# Altium PCB Accumulator_DC-DC.PcbDoc
Units mm, origin at the board's own origin, x right, y up, seen from the top; angles counter-clockwise.
Board outline 108.46 x 67.79 mm, 2 copper layers (Top Layer, Bottom Layer); 23 components, 9 nets, 54 pads, 31 vias.
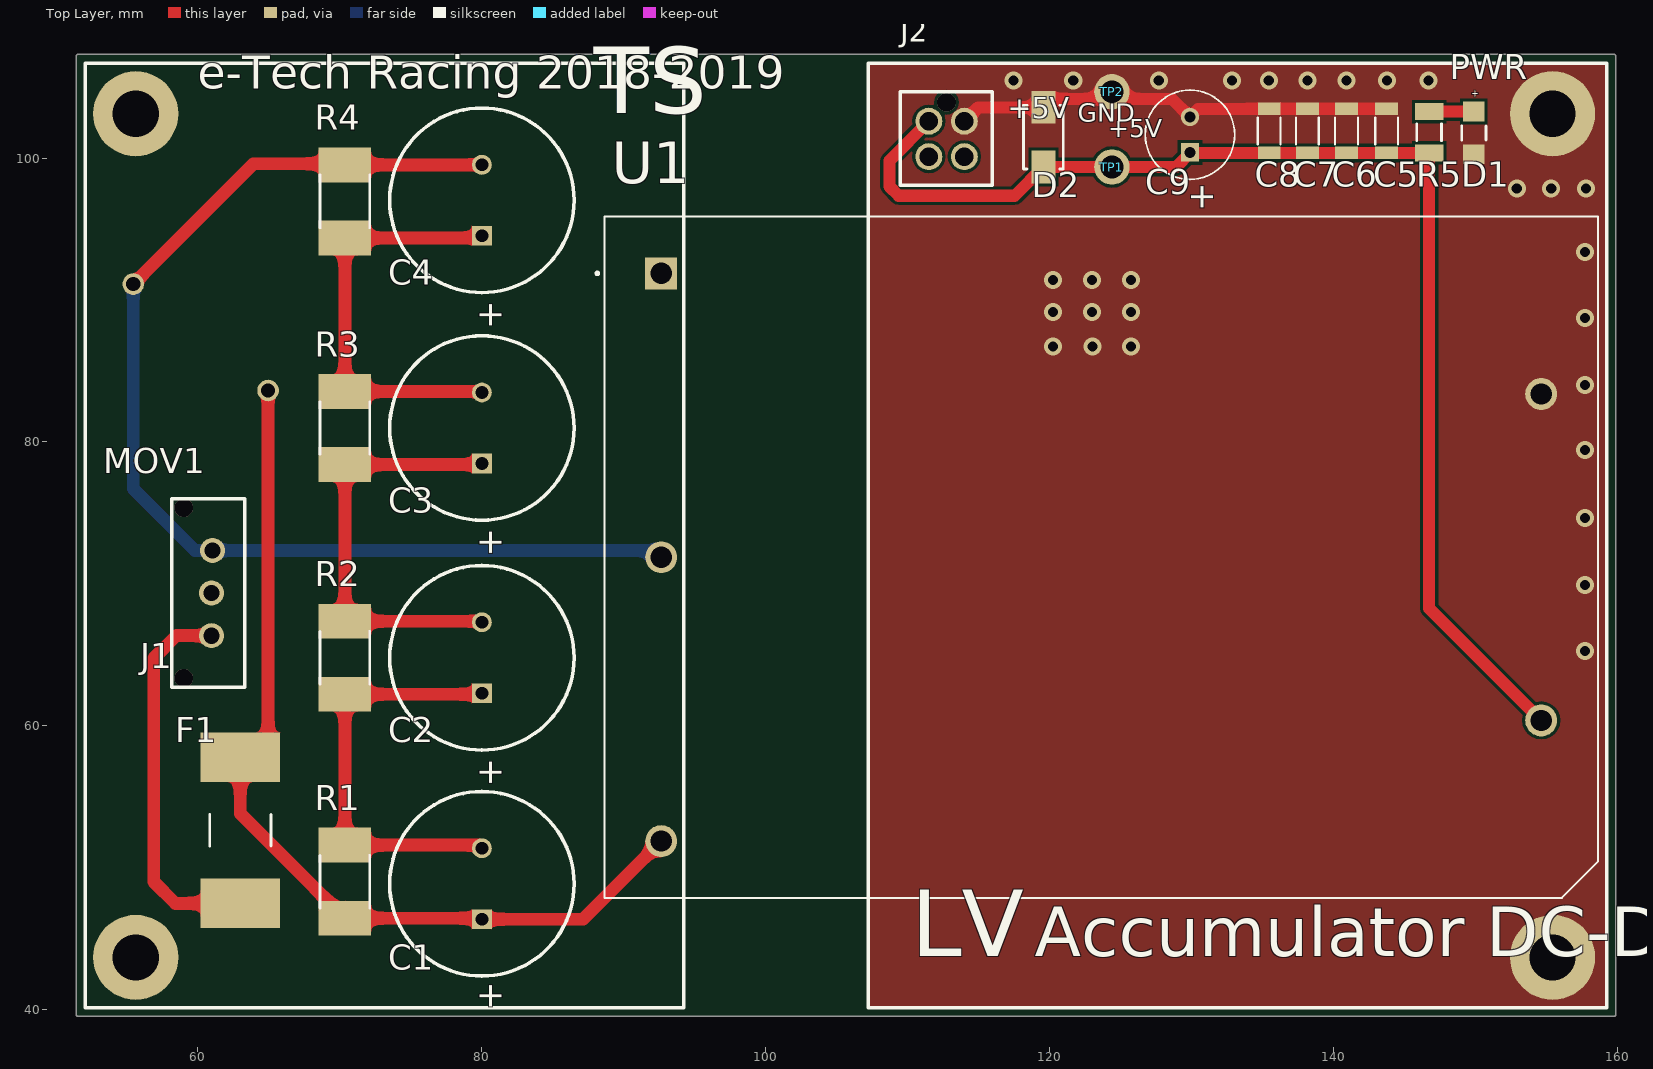
[diagram p0: Top Layer view]
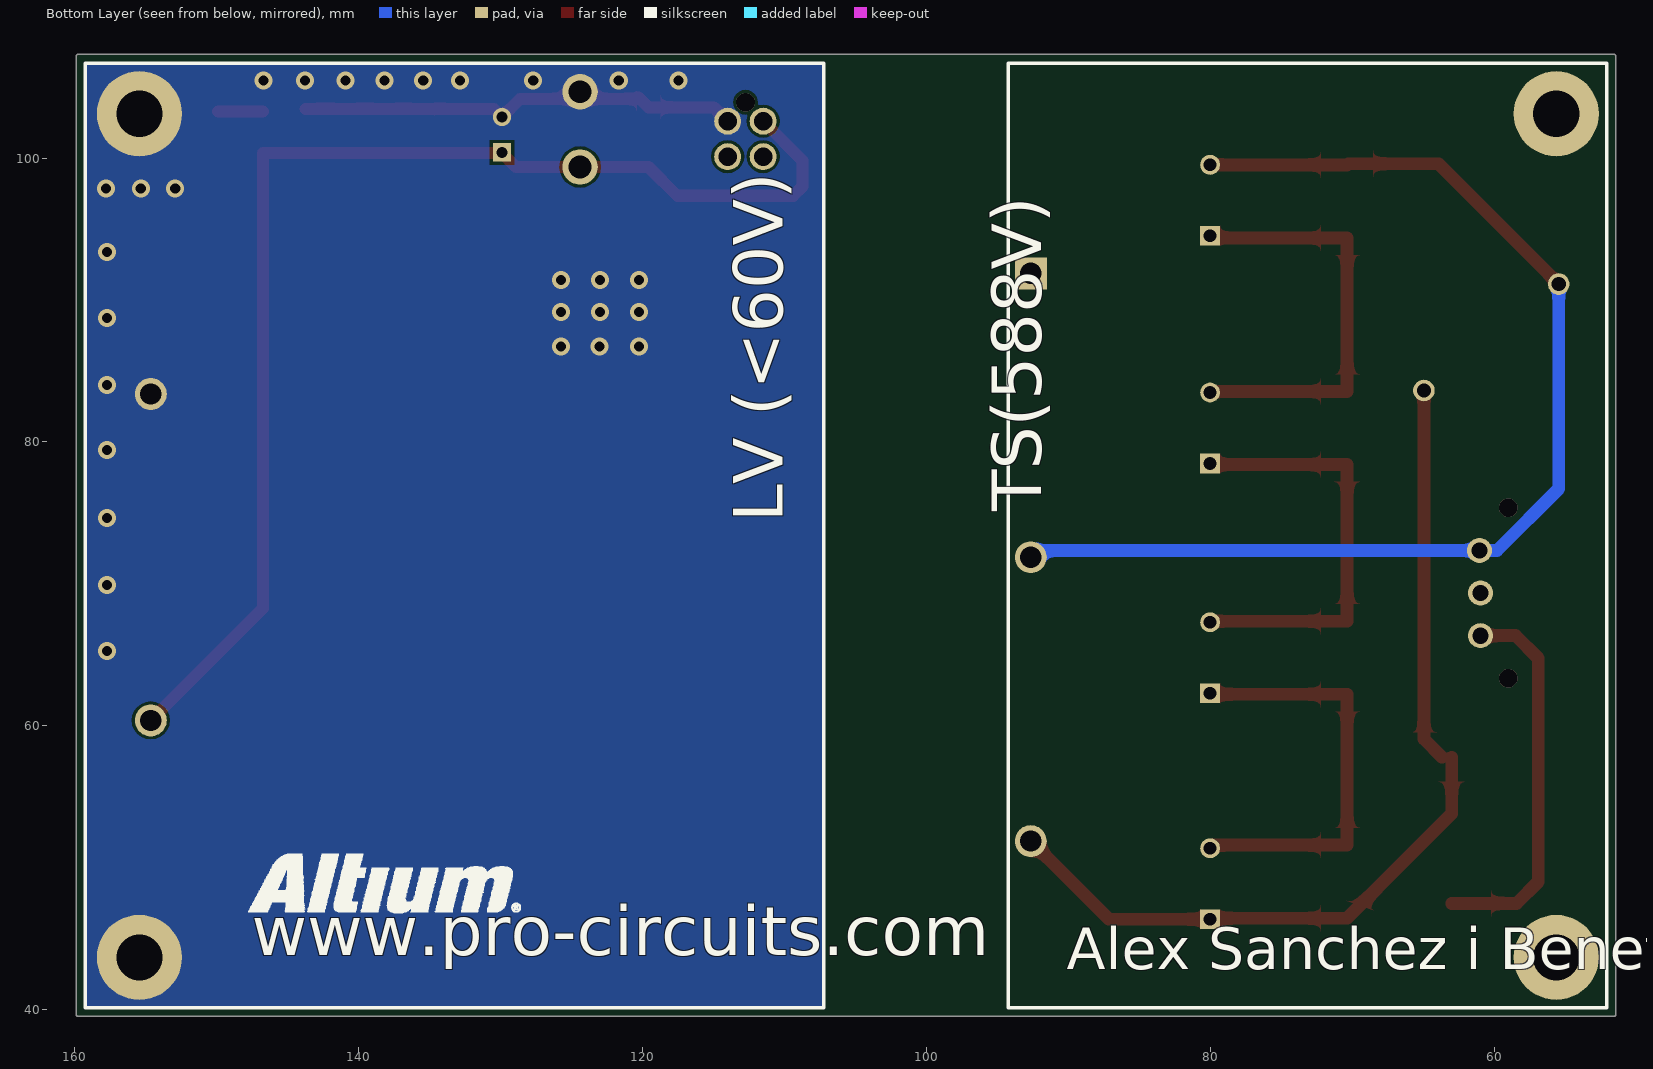
[diagram p1: Bottom Layer view, seen from below]
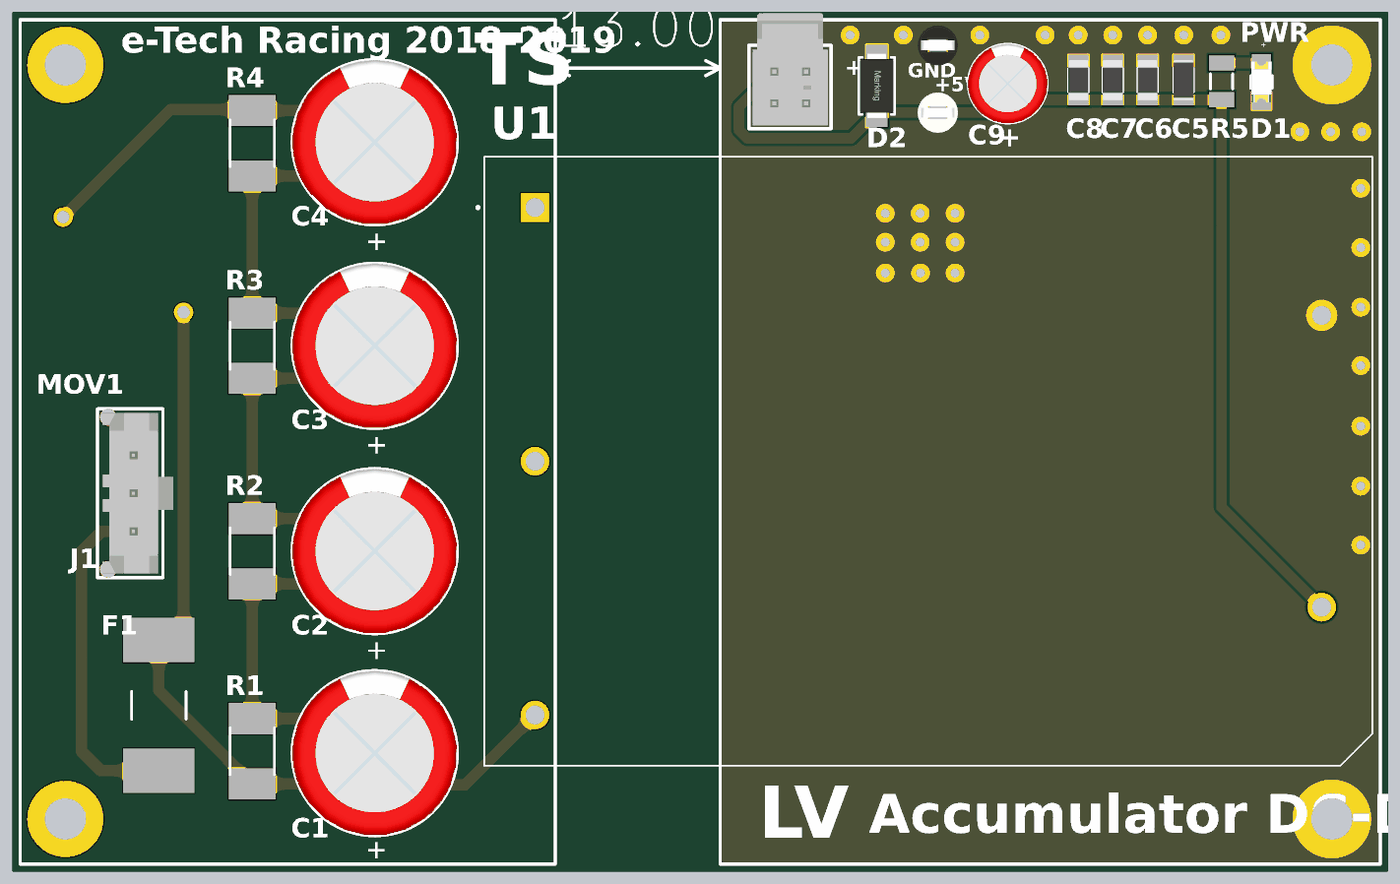
[diagram p2: 3D render of the assembled board from above, using the file's embedded part models]

## Layer stack, top to bottom
Top Solder: solder mask 0.0102, Solder Resist, Dk 3.5
Top Layer: signal copper 0.0356
Dielectric 1: dielectric 0.32, FR-4, Dk 4.8
Bottom Layer: signal copper 0.0356
Bottom Solder: solder mask 0.0102, Solder Resist, Dk 3.5

## Board outline
51.435,39.654 ccw(c51.562,39.654) 51.562,39.526 159.736,39.526 ccw(c159.736,39.654) 159.751,39.527 ccw(c159.766,39.654) 159.893,39.654 159.893,107.188 ccw(c159.766,107.188) 159.766,107.315 51.562,107.315 ccw(c51.562,107.188) 51.435,107.188

## Design rules (kind name [scope] priority, off if disabled: settings)
Clearance [All] p1: gap=0.2 ignorepadtopadclearanceinfootprint=FALSE except(0: Arc-Hole Track-Hole SMDPad-Hole THPad-Hole Via-Hole Fill-Hole Poly-Hole Region-Hole Text-Hole)
PlaneConnect [All] p1: planeconnectstyle=Direct reliefexpansion=0.508 reliefentries=4 reliefconductorwidth=0.254 reliefairgap=0.254
PolygonConnect [All] p1: connectstyle=Direct reliefconductorwidth=0.254 reliefentries=4 polygonreliefangle="90 Angle" airgapwidth=0.254
RoomDefinition Accumulator_DC-DC [InComponentClass('Accumulator_DC-DC')] p1: confinementstyle=ConfineIn formatcopy=TRUE lockcomponents=FALSE outline 50.038,37.846 161.29,37.846 161.29,109.625 50.038,109.625
RoutingVias [All] p1: holewidth=0.711 width=1.27 viastyle="Through Hole" minholewidth=0.711 minwidth=1.27 maxholewidth=0.711 maxwidth=1.27
SolderMaskExpansion [All] p1: expansion=0.102
Width Width_TS [(InNet('TS+') OR InNet('TS-'))] p1: maxlimit=1 minlimit=0.8 preferedwidth=0.9 minimp=50.000000 maximp=50.000000 favimp=50.000000
Width Width_LV_Supply [(InNet('+5') OR InNet('GND_LV'))] p2: maxlimit=0.9 minlimit=0.75 preferedwidth=0.85 minimp=50.000000 maximp=50.000000 favimp=50.000000
Width [All] p3: maxlimit=0.9 minlimit=0.254 preferedwidth=0.254 minimp=50.000000 maximp=50.000000 favimp=50.000000
29 further rules are at their usual default settings.

## Components (designator, comment, footprint, x,y, rotation, side; value= is the part's Value field where it differs from the comment)
C1 "200Vdc, 47uF" WCAP-AT1H_13x20x5 80.01,48.874 r270 top value=47uF
C2 "200Vdc, 47uF" WCAP-AT1H_13x20x5 80.01,64.796 r270 top value=47uF
C3 "200Vdc, 47uF" WCAP-AT1H_13x20x5 80.01,80.986 r270 top locked value=47uF
C4 "200Vdc, 47uF" WCAP-AT1H_13x20x5 80.01,97.028 r270 top value=47uF
C5 "1uF" 1206_3.2x1.6x1.15mm 143.75,101.925 r270 top
C6 "100nF" 1206_3.2x1.6x0.8mm 140.925,101.925 r270 top
C7 "1nF" 1206_3.2x1.6x0.8mm 138.175,101.925 r270 top
C8 "100pF" 1206_3.2x1.6x0.8mm 135.475,101.925 r270 top
C9 "220uF" WCAP-ATG8_6.3x11x2.5 129.9,101.65 r270 top value="220 uF"
D1 "Green, 3.2 V, 140 deg" WL-SMCW_1206 149.9,101.775 r90 top
D2 "400W, 5VDC" WE-TVSP_DO-214AC_Bidirectional 119.575,101.475 r270 top
F1 "600 Vdc, 1A" 485001 62.992,52.644 r90 top
J1 "43650-0327" 43650-0327 60.96,69.36 r270 top
J2 "105310-1104" 105310-1104 112.75,102.6 r0 top
MOV1 "V1000LA80CP" V1000LA160CP 60.198,87.376 r270 top
R1 "2W, 1MΩ" CR2512 70.358,49.022 r270 top
R2 "2W, 1MΩ" CR2512 70.358,64.796 r270 top
R3 "2W, 1MΩ" CR2512 70.358,80.986 r270 top
R4 "2W, 1MΩ" CR2512 70.358,96.95 r270 top
R5 "0.25W, 100Ω" CR1206 146.75,101.825 r270 top
TP1 "5007" 5007 124.4,99.375 r0 top
TP2 "5006" 5006 124.4,104.675 r0 top
U1 "AE5-EW-S5" AE5-EW-S5 92.643,91.882 r0 top

## Footprints (in the part's own frame and the unit in brackets; to place one, negate y for a bottom-side part, rotate by r counter-clockwise, add the part's x,y. Pads: shape width x height; smd on the part's side, far side on the other; paste and mask are expansions set on the pad)
1206_3.2x1.6x0.8mm [mm] "Ceramic Capacitors, 1206, body 3.2x1.6mm"
  rect 0.9x1.6 smd: 1(-1.55,0) 2(1.55,0)
  silkscreen extent -0.95,-0.8 0.95,0.8, body extent -1.6,-0.8 1.6,0.8, height 0.83
1206_3.2x1.6x1.15mm [mm] "Ceramic Capacitors, 1206, body 3.2x1.6mm"
  rect 0.9x1.6 smd: 1(-1.55,0) 2(1.55,0)
  silkscreen extent -0.95,-0.8 0.95,0.8, body extent -1.6,-0.8 1.6,0.8, height 1.18
5006 [mm] "Compact THM Test Point, bLACK"
  round 2.5 hole 1.6: 0(0,0)
  body extent -1.6,-1.6 1.57,1.58, height 5.67
5007 [mm] "Compact THM Test Point, White"
  round 2.5 hole 1.6: 0(0,0)
  body extent -1.6,-1.6 1.58,1.58, height 5.67
43650-0327 [mm] "Micro-Fit 3.0 Vertical Header, 3.00mm Pitch, Single Row, 3 Circuits"
  round 1.75 hole 1.15: 1(3,0) 2(0,0) 3(-3,0.075)
  silkscreen extent -6.65,-2.8 6.65,2.35, body extent -6.32,-2.43 6.33,3.18, height 9.95
105310-1104 [mm] "Molex, Nano-Fit, Right Angle, Dual Row, 4 Circuits, Pitch 2.5 mm, Black"
  round 1.9 hole 1.3: 1(1.25,0) 2(-1.25,0) 3(1.25,-2.5) 4(-1.25,-2.5)
  silkscreen extent -3.25,-4.5 3.22,2.07, body extent -2.97,-4.24 2.97,4.6, height 10.53
485001 [mm] "Littlefuse, Fuse SMD Nano2"
  rect 3.5x5.6 smd: 1(-5.15,0) 2(5.15,0)
  silkscreen extent -1.1,-2.15 1.1,2.15, body extent -6.05,-2.25 6.05,2.25, height 4.5
AE5-EW-S5 [mm]
  rect 2.25x2.25 hole 1.5: 1(0,0)
  round 2.25 hole 1.5: 2(0,-20) 3(0,-40) 4(62,-31.5) 5(62,-8.5)
  silkscreen extent -4.6,-44 66,4, body extent -4.32,-44.26 66.22,4.32, height 23.5
CR1206 [mm] "Chip Resistor, 2-Leads, Body 3,20x1,60mm, IPC Medium Density"
  rect 1.2x2 smd: 1(-1.45,0) 2(1.45,0)
  silkscreen extent -0.6,-0.87 0.6,0.87, body extent -1.73,-0.87 1.73,0.88, height 0.75
CR2512 [mm] "Chip Resistor, 2-Leads, Body 6,40x3,20mm, IPC Medium Density"
  rect 2.45x3.7 smd: 1(-2.575,0) 2(2.575,0)
  silkscreen extent -1.85,-1.75 1.85,1.75, body extent -3.3,-1.7 3.3,1.7, height 0.75
V1000LA160CP [mil] "Littlefuse, C-III Varistor Series"
  round 60 hole 39.37: 1(-147.71,-187.01) 2(147.56,187)
  body extent -335,-276 335,276, height 886
WCAP-AT1H_13x20x5 [mm] "Aluminium Electrolytic Radial THD Capacitors, §¶13x20mm"
  rect 1.4x1.4 hole 0.9: 1(2.5,0)
  round 1.4 hole 0.9: 2(-2.5,0)
  silkscreen extent -6.5,-6.5 6.5,6.5, body extent -6.49,-6.5 6.5,6.5, height 20.26
WCAP-ATG8_6.3x11x2.5 [mm] "Aluminum Electrolytic Capacitors, 6.3x11mm"
  rect 1.3x1.3 hole 0.8: 1(1.25,0)
  round 1.3 hole 0.8: 2(-1.25,0)
  silkscreen extent -3.15,-3.15 3.15,3.15, body extent -3.14,-3.15 3.15,3.15, height 11.31
WE-TVSP_DO-214AC_Bidirectional [mm] "Power TVS Diode, 2-Leads. body 4.5x2.8mm"
  rect 2.3x1.7 smd: 1(-2.1,0) 2(2.1,0)
  silkscreen extent -2.25,-1.4 2.25,1.4, body extent -2.56,-1.33 2.56,1.34, height 2.24
WL-SMCW_1206 [mm] "SMD Mono-color Chip LED, body 3.2x1.6mm"
  rect 1.4x1.5 smd: 1(-1.5,0) 2(1.5,0)
  silkscreen extent -0.5,-0.85 0.5,0.85, body extent -1.6,-0.8 1.6,0.8, height 0.68

## Part data
C1 C2 C3 C4: library part 860241078002, "WCAP-AT1H Aluminum Electrolytic Capacitors, size ?13x20mm, 200V DC, 47uF", Operating Temperature="-25 °C up to +105 °C", Rated Voltage="200V DC", ComponentLink1Description=Manufacturer, ComponentLink1URL=http://www.we-online.de, ComponentLink2Description=Datasheet, ComponentLink2URL=http://katalog.we-online.de/pbs/datasheet/860241078002.pdf, Life Cycle=10000h, Part Number=860241078002, Published Date="June 2017", Publisher="Wurth Elektronik", Size=?13x20mm
C5: library part 885012208013, "WCAP-CSGP Ceramic Capacitors, 1206, X7R, 10V, 1uF", Manufacturer="Wurth Elektronik", Operating Temperature="-55 °C to +125 °C", Rated Voltage="10V DC", Ceramic Type=X7R, ComponentLink1Description=Manufacturer, ComponentLink1URL=http://www.we-online.de, ComponentLink2Description=Datasheet, ComponentLink2URL=http://katalog.we-online.de/pbs/datasheet/885012208013.pdf, Part Number=885012208013, Size=1206
C6: library part 885012208009, "WCAP-CSGP Ceramic Capacitors, 1206, X7R, 10V, 100nF", Manufacturer="Wurth Elektronik", Operating Temperature="-55 °C to +125 °C", Rated Voltage="10V DC", Ceramic Type=X7R, ComponentLink1Description=Manufacturer, ComponentLink1URL=http://www.we-online.de, ComponentLink2Description=Datasheet, ComponentLink2URL=http://katalog.we-online.de/pbs/datasheet/885012208009.pdf, Part Number=885012208009, Size=1206
C7: library part 885012208006, "WCAP-CSGP Ceramic Capacitors, 1206, X7R, 10V, 1nF", Manufacturer="Wurth Elektronik", Operating Temperature="-55 °C to +125 °C", Rated Voltage="10V DC", Ceramic Type=X7R, ComponentLink1Description=Manufacturer, ComponentLink1URL=http://www.we-online.de, ComponentLink2Description=Datasheet, ComponentLink2URL=http://katalog.we-online.de/pbs/datasheet/885012208006.pdf, Part Number=885012208006, Size=1206
C8: library part 885012008004, "WCAP-CSGP Ceramic Capacitors, 1206, NP0, 10V, 100pF", Manufacturer="Wurth Elektronik", Operating Temperature="-55 °C to +125 °C", Rated Voltage="10V DC", Ceramic Type=NP0, ComponentLink1Description=Manufacturer, ComponentLink1URL=http://www.we-online.de, ComponentLink2Description=Datasheet, ComponentLink2URL=http://katalog.we-online.de/pbs/datasheet/885012008004.pdf, Part Number=885012008004, Size=1206
C9: library part 860010273009, "WCAP-ATG8 Aluminum Electrolytic Capacitors, 6.3x11mm, 10 Vdc, 220 uF", Manufacturer="Wurth Elektronik", Operating Temperature="-40 °C up to +85 °C", Rated Voltage="10 Vdc", ComponentLink1Description=Manufacturer, ComponentLink1URL=http://www.we-online.de, ComponentLink2Description=Datasheet, ComponentLink2URL=http://katalog.we-online.de/pbs/datasheet/860010273009.pdf, Life Cycle=2000h, Part Number=860010273009, Size=6.3x11mm
D1: library part 150120GS75000, "SMT Mono-color Chip LED Waterclear WL-SMCW, size 1206, Green, 3.2 V, 140 deg, 450 mcd", Emitting Color=Green, Forward Voltage="3.2 V", Operating Temperature="-40 to 85 degC", Chip Technology=InGaN, ComponentLink1Description=Manufacturer, ComponentLink1URL=http://www.we-online.de, ComponentLink2Description=Datasheet, ComponentLink2URL=https://katalog.we-online.de/led/datasheet/150120GS75000.pdf, Dominant Wavelength="525 nm", Luminous Intensity="450 mcd", Mounting Technology=SMT, Packaging="Tape and Reel", Part Number=150120GS75000, Peak Wavelength="515 nm", Published Date="November 2018", Publisher="Wurth Elektronik", Size=1206, Viewing Angle="140 deg"
D2: library part 824501500, "WE-TVSP Power TVS Diode, size DO-214AC, Bidirectional, 400 W, 5 VDC", Manufacturer="Wurth Elektronik", Operating Temperature="-65ºC to 150 ºC", Peak Pulse Current="43.5 A", Power Dissipation="400 W", Reverse Breakdown Voltage="6.7 V", Reverse Stand-Off Voltage="5 V", Surge Clamping Voltage="9.2 V", ComponentLink1Description=Manufacturer, ComponentLink1URL=http://www.we-online.de, ComponentLink2Description=Datasheet, ComponentLink2URL=https://katalog.we-online.de/pbs/datasheet/824501500.pdf, Mounting Technology=SMT, Packaging="Tape and Reel", Part Number=824501500, Polarity=Bidirectional, Size=DO-214AC
F1: library part 485001, "485 Series Fuse", Manufacturer=Littlefuse, ComponentLink1Description=Datasheet, ComponentLink1URL=https://www.littelfuse.com/~/media/electronics/datasheets/fuses/littelfuse_fuse_485_datasheet.pdf.pdf
J1: "Micro-Fit 3.0 Vertical Header, 3.00mm Pitch, Single Row, 3 Circuits, Black", Manufacturer=Molex, Operating Temperature="-40° to +105°C", Rated Current=8.5A, Rated Voltage="600V DC", Circuits=3, ComponentLink1Description=Datasheet, ComponentLink1URL=https://www.molex.com/webdocs/datasheets/pdf/en-us/0436500327_PCB_HEADERS.pdf, Number of Row=1
J2: "Nano-Fit Vertical Header, Through Hole, 2.50mm Pitch, Dual Row, 4 Circuits, Black", Manufacturer=Molex, Operating Temperature="-40° to +105°C", Rated Current=6.5A, Rated Voltage="250V DC", ComponentLink2Description=Datasheet, ComponentLink2URL=https://www.molex.com/webdocs/datasheets/pdf/en-us/1053101104_PCB_HEADERS.pdf
MOV1: "C-III Varistor Series", Manufacturer=Littlefuse, ComponentLink1Description=Datasheet, ComponentLink1URL=https://www.littelfuse.com/~/media/electronics/datasheets/varistors/littelfuse_varistor_ciii_datasheet.pdf.pdf
R1 R2 R3 R4: library part CRS2512-FX-1004ELF, "High Power Anti-Surge Chip Resistor", Manufacturer=Bourns, ComponentLink1Description=Datasheet, ComponentLink1URL=https://www.bourns.com/docs/product-datasheets/crs.pdf?sfvrsn=2852b1ed_29
R5: library part CR1206-FX-1000ELF, "Chip Resistor", Manufacturer=Bourns, ComponentLink1Description=Datasheet, ComponentLink1URL=https://www.bourns.com/docs/product-datasheets/chpreztr.pdf?sfvrsn=566c91f1_11
TP1: "Compact THM Test Point, White", Manufacturer="Keystone Electronics", ComponentLink1Description="Datasheet (Mouser)", ComponentLink1URL=https://eu.mouser.com/datasheet/2/215/005-5009-741293.pdf
TP2: "Compact THM Test Point, Black", Color=Black, Manufacturer="Keystone Electronics", ComponentLink1Description="Datasheet (Mouser)", ComponentLink1URL=https://eu.mouser.com/datasheet/2/215/005-5009-741293.pdf
U1: "Ultra Wide Voltage Input DC-DC Converter", Manufacturer="CUI INC", ComponentLink1Description=Datasheet, ComponentLink1URL=https://www.cui.com/product/resource/ae5-ew.pdf, Datasheet=https://www.cui.com/product/resource/ae5-ew.pdf

## Free pads (board coordinates)
  round 6 hole 3.25: ""(55.626,43.688) ""(55.626,103.124) ""(155.448,43.688) ""(155.448,103.124)

## Via types
v1: diameter 1.27, hole 0.711, Top Layer to Bottom Layer, 28 vias
v2: diameter 1.3, hole 1.3, Top Layer to Bottom Layer, 2 vias
v3: diameter 1.32, hole 1.32, Top Layer to Bottom Layer, 1 vias

## Nets (pads, with @x,y where several pads share a name; then routed paths per layer and width w, separated by ;. In a path a pad name is that pad's centre, name@x,y a point inside that pad or via, vN(x,y) a via of type N, cw(c..) or ccw(c..) an arc to the next point about the centre after c; other vN are vias at no path point)
+5: C5.2 C6.2 C7.2 C8.2 C9.1 D2.2 J2.2 R5.2 TP1.0 U1.4 | length 88.6
  Top Layer w0.85: J2.2 108.725,99.825 108.725,98 109.375,97.35 117.55,97.35 D2.2 TP1.0 128.925,99.375 129.925,100.375 C8.2 C7.2 C6.2 C5.2 R5.2 146.75,68.275 U1.4
GND_LV: C5.1 C6.1 C7.1 C8.1 C9.2 D1.1 D2.1 J2.1 pad.@155.448,43.688 pad.@155.448,103.124 TP2.0 U1.5 | length 31.6
  Top Layer w0.85: J2.1 114.975,103.575 D2.1 D2.1@120.275,104.275 ; D2.1@120.275,104.175 TP2.0@124,104.175 ; TP2.0@124,104.275 TP2.0 124.9,104.175 128.625,104.175 C9.2 130.475,103.475 C8.1 C7.1 C6.1 C5.1
  other v1: 157.725,65.275 157.725,69.925 157.725,74.65 157.725,79.425 157.725,84.025 120.25,86.725 123.025,86.725 125.75,86.725 157.725,88.725 120.25,89.15 123,89.15 125.75,89.15 120.25,91.428 123,91.428 125.75,91.428 157.725,93.4 152.925,97.85 155.35,97.85 157.8,97.85 117.475,105.475 121.675,105.475 127.7,105.475 132.85,105.475 135.45,105.475 138.175,105.475 140.925,105.475 143.775,105.475 146.7,105.475
NetC1_1: C1.1 F1.2 MOV1.2 R1.2 U1.3 | length 66
  Top Layer w0.254: F1.2 F1.2@63.669,57.794 ; C1.1@79.937,46.447 C1.1
  Top Layer w0.9: F1.2 62.992,53.813 R1.2 C1.1@79.937,46.447 ; F1.2@63.669,57.794 64.948,59.073 MOV1.2 ; C1.1 87.135,46.374 U1.3
NetC1_2: C1.2 C2.1 R1.1 R2.2 | length 30.1
  Top Layer w0.254: C1.2@79.787,51.597 C1.2 ; C2.1@79.935,62.221 C2.1
  Top Layer w0.9: C1.2@79.787,51.597 R1.1 R2.2 C2.1@79.935,62.221
NetC2_2: C2.2 C3.1 R2.1 R3.2 | length 30.4
  Top Layer w0.254: C2.2@79.935,67.371 C2.2 ; C3.1@79.935,78.411 C3.1
  Top Layer w0.9: C2.2@79.935,67.371 R2.1 R3.2 C3.1@79.935,78.411
NetC3_2: C3.2 C4.1 R3.1 R4.2 | length 30.2
  Top Layer w0.254: C4.1@79.857,94.375 C4.1 ; C3.2@79.935,83.561 C3.2
  Top Layer w0.9: C4.1@79.857,94.375 R4.2 R3.1 C3.2@79.935,83.561
NetD1_2: D1.2 R5.1 | length 3.2
  Top Layer w0.254: D1.2@149.897,103.278 D1.2
  Top Layer w0.85: R5.1 149.894,103.275 D1.2@149.897,103.278
TS+: F1.1 J1.1 | length 27.2
  Top Layer w0.9: J1.1 58.486,66.36 56.896,64.77 56.896,49.022 58.424,47.494 F1.1
TS-: C4.2 J1.3 MOV1.1 R4.1 U1.2 | length 81.8
  Top Layer w0.9: MOV1.1 63.923,99.603 70.28,99.603 R4.1 79.857,99.525 79.935,99.603 C4.2
  Bottom Layer w0.9: MOV1.1 55.448,76.712 59.8,72.36 J1.3 92.165,72.36 U1.2
pads on no net: J1.2 J2.3 J2.4 U1.1
copper on no net:
  other v2: 59,63.36 59,75.36
  other v3: 112.75,103.94

## Polygon pours and split planes (outlines as drawn)
GND_LV on Bottom Layer "Bottom Layer-GND_LV" (solid, pour order 4): 107.25,106.675 107.25,40.15 159.225,40.15 159.25,40.125 159.25,106.675
GND_LV on Top Layer "Top Layer-GND_LV" (solid, pour order 2): 107.25,106.675 107.25,40.15 159.225,40.15 159.25,40.125 159.25,106.675

## Silkscreen, mask and mechanical layers (free items; w line width, h text height)
Top Overlay:
  lines w0.254: 52.07,40.132 94.234,40.132 94.234,106.68 52.07,106.68 52.07,40.132 ; 107.234,40.132 159.258,40.132 159.258,106.68 107.234,106.68 107.234,40.132
  text "PWR" at 148.2,104.95 h3
  text "e-Tech Racing 2018-2019" at 60,104.1 h4
  text "+5V" at 117.05,102.325 h2.5
  text "GND" at 122,102.15 h2.2
  text "TS" at 87.884,101.6 h8
  text "+5V" at 124.125,101.05 h2.2
  text "Accumulator DC-DC" at 118.95,42.6 h6
  text "LV" at 110.25,42.225 h8
Bottom Overlay:
  drawing of 1348 lines, arcs and shapes, not listed
  text "TS(588V)" at 90.75,75.105 h6 r270
  text "LV (<60V)" at 108.95,74.35 h6 r270
  text "www.pro-circuits.com" at 147.525,42.675 h6
  text "Alex Sanchez i Benet" at 90.1,41.9 h5

## Dimensions
107.234,106.68 to 94.234,106.68 on Bottom Overlay
94.234,106.68 to 107.234,106.68 on Top Overlay

## Text inside footprints (layer, text, board x,y; h text height)
C1: Top Overlay "+" at 79.248,41.976 h3 r270
C2: Top Overlay "+" at 79.273,57.721 h3 r270
C3: Top Overlay "+" at 79.273,73.911 h3 r270
C4: Top Overlay "+" at 79.273,89.953 h3 r270
C9: Top Overlay "+" at 129.4,98.25 h3 r270
D1: Top Overlay "+" at 150.25,104.925 h0.76 r180